# EAGLE board DRA818 (EAGLE 9.6.2)
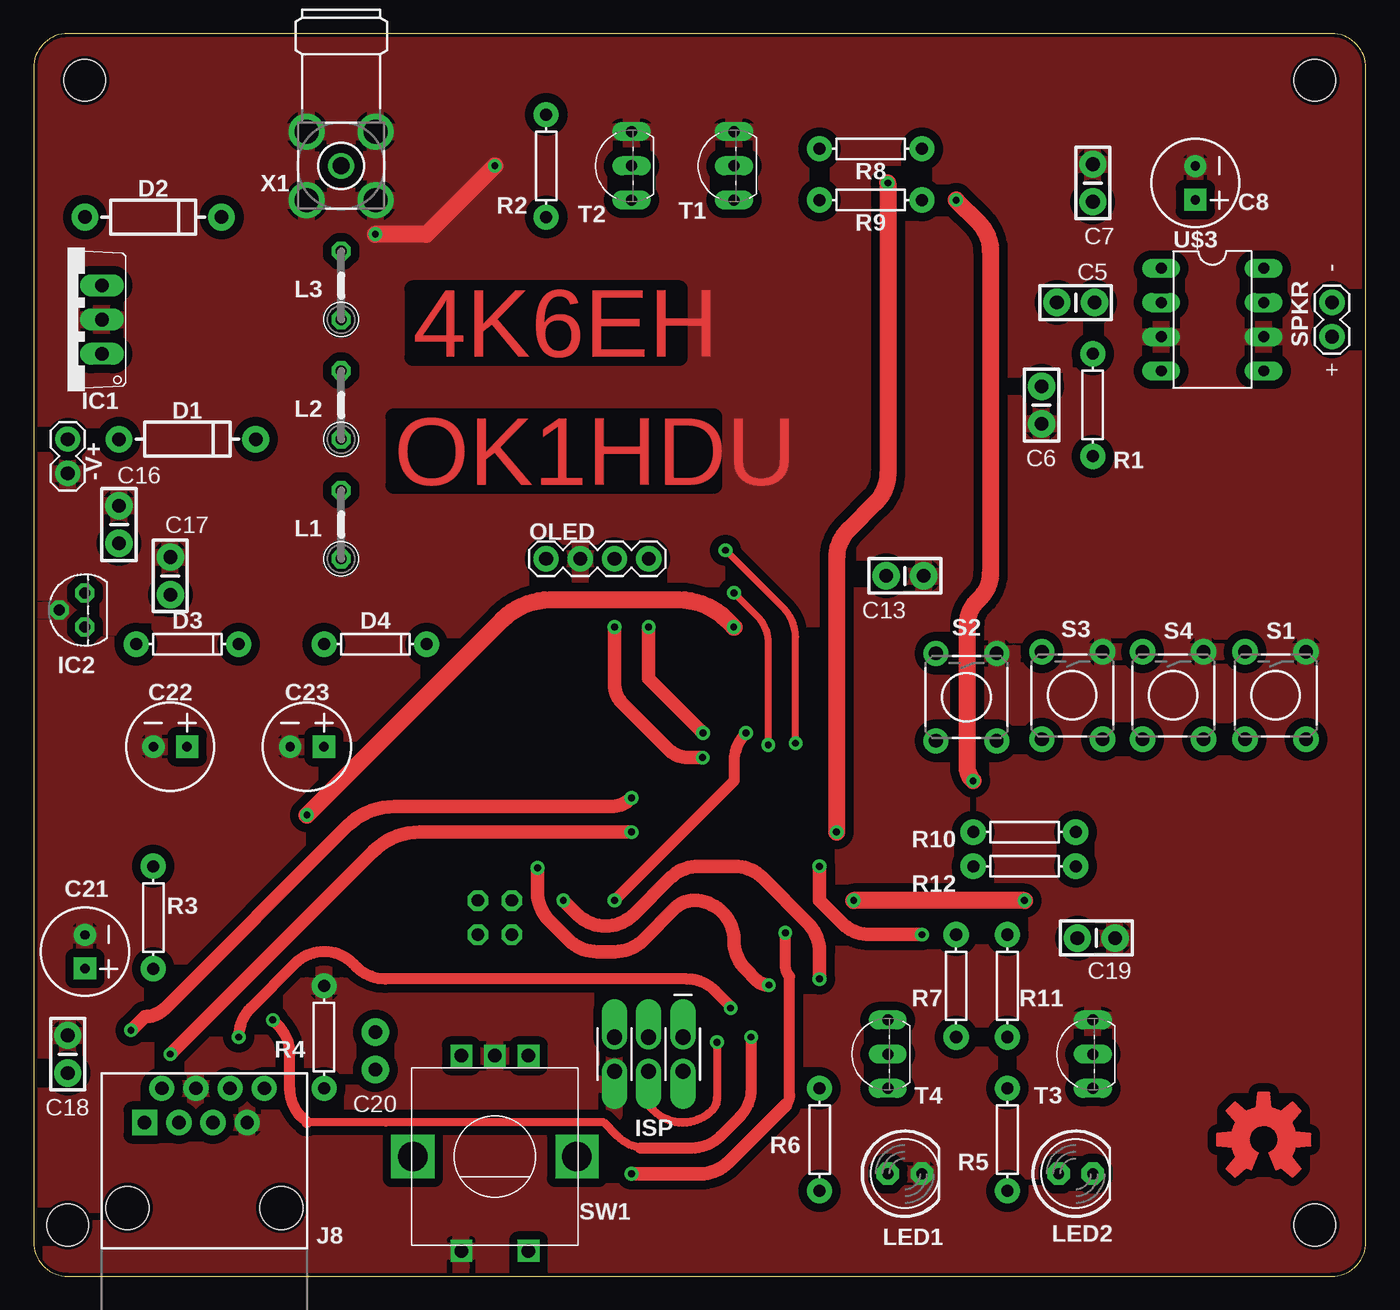
[diagram p0: board, top side]
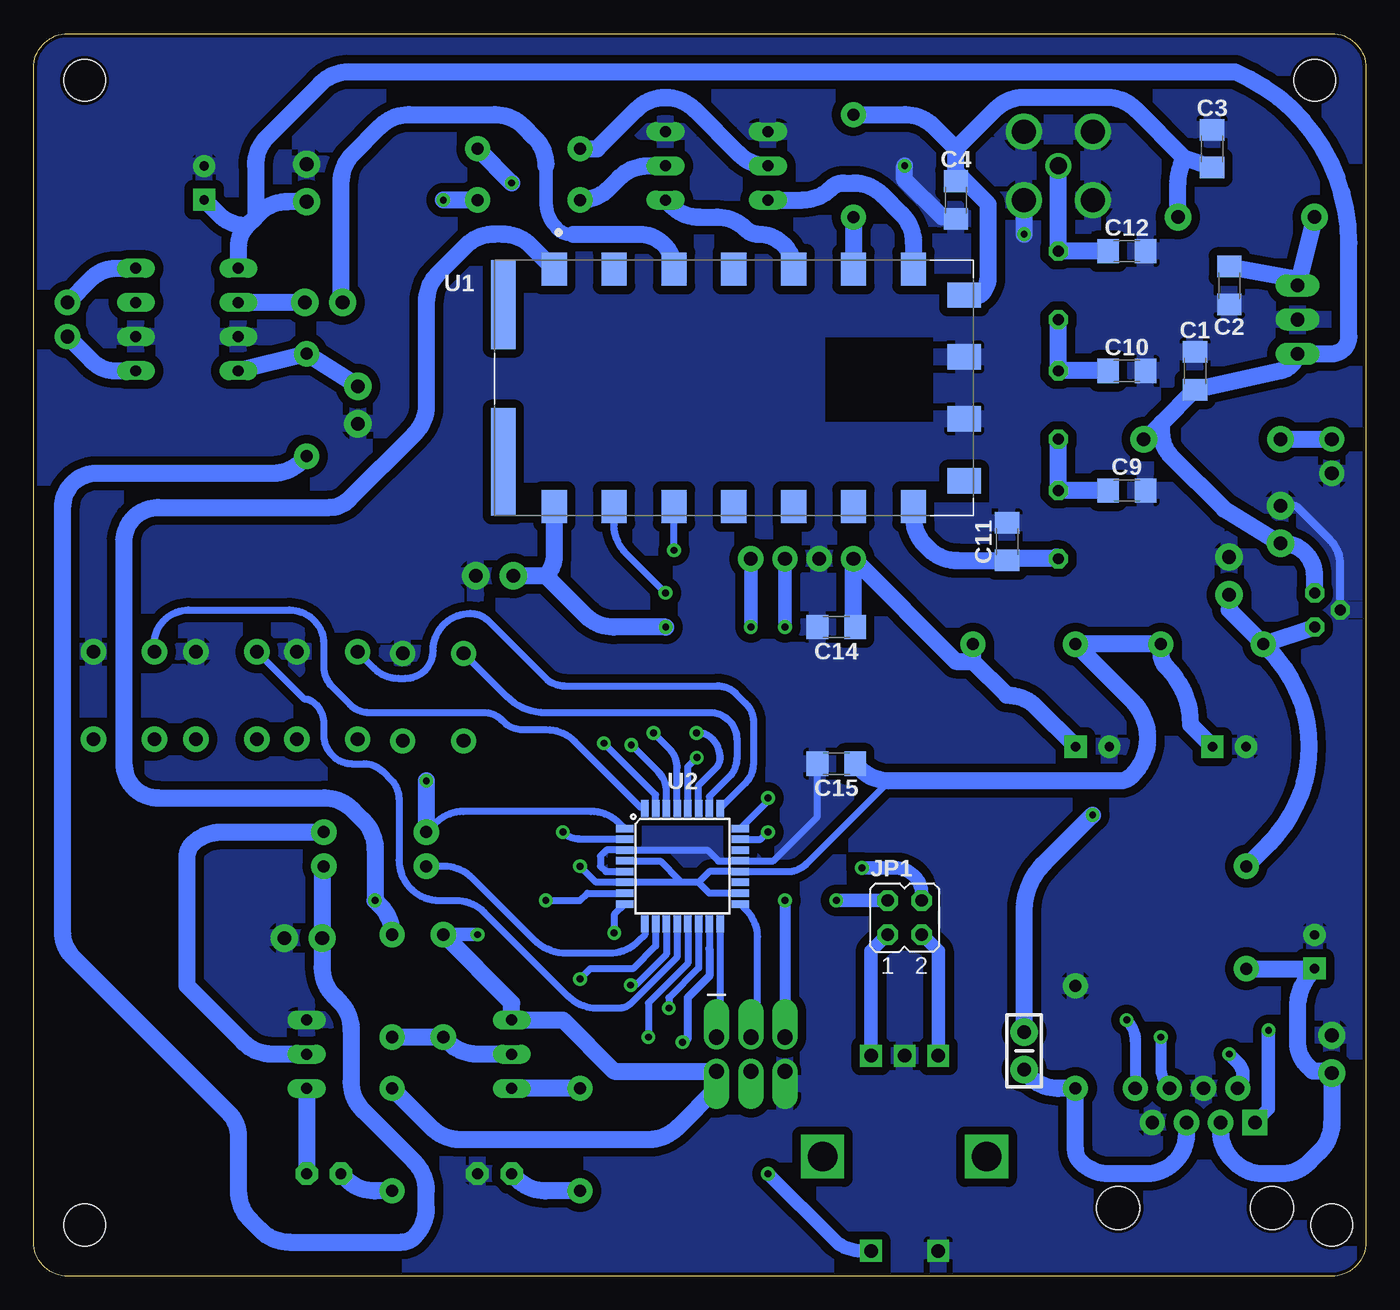
[diagram p1: board, bottom side, seen from below]

Size 99.04 x 92.38 mm. Coordinates in mm from the lower left corner, seen from the top.
Outline: 2.54,0 96.5,0 arc90 99.04,2.54 99.04,89.84 arc90 96.5,92.38 2.54,92.38 arc90 0,89.84 0,2.54 arc90 2.54,0
Copper layers (1*16): Top 0.035mm / dielectric 1.5mm / Bottom 0.035mm
Design rules "SparkFun *": minimum track width 8mil, minimum drill 20mil, track to track 25mil, track to pad 25mil, pad to pad 8mil, via to via 8mil, smd to smd 8mil, copper to edge 10mil, drill to drill 8mil, minimum pad ring 12mil, minimum via ring 10mil, stop-mask expansion 4mil, vias tented up to drill 25mil, thermal gap 10mil
Holes 3.1 mm at 95.25,88.9 95.25,3.81 3.81,88.9 2.54,3.81

## Footprints (pad centres in the part's own frame; a part is rotated, then mirrored left to right if it is on the bottom)
1X02 = drill 1.016 pad 1.88: 1 0,0; 2 2.54,0
1206 = smd 1.6 x 1.8: 1 -1.4,0; 2 1.4,0
CAP-PTH-SMALL-KIT = drill 1.016 pad 2.032: 1 -1.397,0; 2 1.397,0
CPOL-RADIAL-2.5MM-6.5MM = drill 0.7 pad 1.651 square: 1 1.25,0 | drill 0.7 pad 1.651: 2 -1.25,0
DIODE-1N4001 = drill 1 pad 1.981: A -5.08,0; C 5.08,0
DIODE-1N4148 = drill 0.9 pad 1.88: A -3.81,0; C 3.81,0
TO220V = drill 1.016 long: 1 -2.54,-2.54; 2 0,-2.54; 3 2.54,-2.54
TO92 = drill 0.813 octagon: 1 -1.27,0; 2 0,1.905; 3 1.27,0
2X3_OFFSET = drill 1.118 pad 1.88 offset: 1 -2.54,-1.27; 2 -2.54,1.27; 3 0,-1.27; 4 0,1.27; 5 2.54,-1.27; 6 2.54,1.27
RJ45-8 = drill 1 pad 1.88 square: 1 -4.445,6.35 | drill 1 pad 1.88: 2 -3.175,8.89; 3 -1.905,6.35; 4 -0.635,8.89; 5 0.635,6.35; 6 1.905,8.89; 7 3.175,6.35; 8 4.445,8.89 | hole 3.2: -5.715,0; 5.715,0
JP2Q = drill 0.914 octagon: 1 -1.27,-1.27; 2 -1.27,1.27; 3 1.27,-1.27; 4 1.27,1.27
0207/5V = drill 0.813 octagon: 1 -2.54,0; 2 2.54,0
LED5MM = drill 0.813 pad 1.676 octagon: A -1.27,0; K 1.27,0
1X04 = drill 1.016 pad 1.88: 1 0,0; 2 2.54,0; 3 5.08,0; 4 7.62,0
AXIAL-0.3 = drill 0.9 pad 1.88: P$1 -3.81,0; P$2 3.81,0
TACTILE_SWITCH_PTH_6.0MM = drill 1.016 pad 1.88: 1 -3.251,2.261; 2 3.251,2.261; 3 -3.251,-2.261; 4 3.251,-2.261
ALPS_EC12E_SW = drill 1 square: A -2.5,-7.5; B 2.5,-7.5; C 0,-7.5; D -2.5,7; E 2.5,7 | drill 2.2 square: GND1 -6.1,0; GND2 6.1,0
TO92-CBE = drill 0.813 long: B 0,0; C -2.54,0; E 2.54,0
TO92-EBC = drill 0.813 long: B 0,-1.27; C -2.54,-1.27; E 2.54,-1.27
DORJI_DRA818V = smd 1.88 x 2.47: 1 -13.35,8.825; 2 -8.9,8.825; 3 -4.45,8.825; 4 0,8.825; 5 4.45,8.825; 6 8.9,8.825; 7 13.35,8.825; 12 13.35,-8.825; 13 8.9,-8.825; 14 4.45,-8.825; 15 0,-8.825; 16 -4.45,-8.825; 17 -8.9,-8.825; 18 -13.35,-8.825 | smd 2.47 x 1.88: 8 17.125,6.9; 9 17.125,2.3; 10 17.125,-2.3; 11 17.125,-6.9 | smd 1.8 x 6.6: P2 -17.125,6.2 | smd 1.8 x 8: P3 -17.125,-5.5
TQFP32-08 = smd 1.27 x 0.559: 1 -4.293,2.8; 2 -4.293,2; 3 -4.293,1.2; 4 -4.293,0.4; 5 -4.293,-0.4; 6 -4.293,-1.2; 7 -4.293,-2; 8 -4.293,-2.8; 17 4.293,-2.8; 18 4.293,-2; 19 4.293,-1.2; 20 4.293,-0.4; 21 4.293,0.4; 22 4.293,1.2; 23 4.293,2; 24 4.293,2.8 | smd 0.559 x 1.27: 9 -2.8,-4.293; 10 -2,-4.293; 11 -1.2,-4.293; 12 -0.4,-4.293; 13 0.4,-4.293; 14 1.2,-4.293; 15 2,-4.293; 16 2.8,-4.293; 25 2.8,4.293; 26 2,4.293; 27 1.2,4.293; 28 0.4,4.293; 29 -0.4,4.293; 30 -1.2,4.293; 31 -2,4.293; 32 -2.8,4.293
DIL08 = drill 0.813 long: 1 -3.81,-3.81; 2 -1.27,-3.81; 3 1.27,-3.81; 4 3.81,-3.81; 5 3.81,3.81; 6 1.27,3.81; 7 -1.27,3.81; 8 -3.81,3.81
BU-SMA-H = drill 1.27: 1 0,0 | drill 1.778: 2 -2.55,2.55; 3 2.55,2.55; 4 2.55,-2.55; 5 -2.55,-2.55

## Placement (x,y rotation side)
-V+  [1X02]  2.54,59.69 90 top
C1  0.1uF  [1206]  12.7,67.31 90 bottom
C2  0.1uF  [1206]  10.16,73.66 270 bottom
C3  0.1uF  [1206]  11.43,83.82 90 bottom
C4  0.1uF  [1206]  30.48,80.01 270 bottom
C5  0.1uF  [CAP-PTH-SMALL-KIT]  77.47,72.39 0 top
C6  0.22uF  [CAP-PTH-SMALL-KIT]  74.93,64.77 270 top
C7  1uF  [CAP-PTH-SMALL-KIT]  78.74,81.28 90 top
C8  47uF  [CPOL-RADIAL-2.5MM-6.5MM]  86.36,81.28 270 top
C9  10pF  [1206]  17.78,58.42 0 bottom
C10  10pF  [1206]  17.78,67.31 0 bottom
C11  2.4pF  [1206]  26.67,54.61 90 bottom
C12  2.4pF  [1206]  17.78,76.2 0 bottom
C13  ***  [CAP-PTH-SMALL-KIT]  64.77,52.07 0 top
C14  0.1uF  [1206]  39.37,48.26 180 bottom
C15  0.1uF  [1206]  39.37,38.1 180 bottom
C16  0.1uF  [CAP-PTH-SMALL-KIT]  6.35,55.88 270 top
C17  0.1uF  [CAP-PTH-SMALL-KIT]  10.16,52.07 90 top
C18  0.1uF  [CAP-PTH-SMALL-KIT]  2.54,16.51 270 top
C19  0.22uF  [CAP-PTH-SMALL-KIT]  78.99,25.15 0 top
C20  0.22uF  [CAP-PTH-SMALL-KIT]  25.4,16.76 270 bottom
C21  47uF  [CPOL-RADIAL-2.5MM-6.5MM]  3.81,24.13 270 top
C22  220uF  [CPOL-RADIAL-2.5MM-6.5MM]  10.16,39.37 0 top
C23  220uF  [CPOL-RADIAL-2.5MM-6.5MM]  20.32,39.37 0 top
D1  [DIODE-1N4001]  11.43,62.23 0 top
D2  [DIODE-1N4001]  8.89,78.74 0 top
D3  1N4148  [DIODE-1N4148]  11.43,46.99 0 top
D4  1N4148  [DIODE-1N4148]  25.4,46.99 0 top
IC1  7805TV  [TO220V]  2.54,71.12 90 top
IC2  78L05Z  [TO92]  3.81,49.53 90 top
ISP  [2X3_OFFSET]  45.72,16.51 180 top
J8  RJ45  [RJ45-8]  12.7,5.08 0 top
JP1  [JP2Q]  34.29,26.67 0 bottom
L1  [0207/5V]  22.86,55.88 90 top
L2  [0207/5V]  22.86,64.77 90 top
L3  [0207/5V]  22.86,73.66 90 top
LED1  [LED5MM]  64.77,7.62 0 top
LED2  [LED5MM]  77.47,7.62 0 top
OLED  128x64px  [1X04]  38.1,53.34 0 top
R1  4k7  [AXIAL-0.3]  78.74,64.77 90 top
R2  10k  [AXIAL-0.3]  38.1,82.55 90 top
R3  47R  [AXIAL-0.3]  8.89,26.67 90 top
R4  680R  [AXIAL-0.3]  21.59,17.78 270 top
R5  1k  [AXIAL-0.3]  72.39,10.16 90 top
R6  1k  [AXIAL-0.3]  58.42,10.16 90 top
R7  2.7k  [AXIAL-0.3]  68.58,21.59 90 top
R8  2.7k  [AXIAL-0.3]  62.23,83.82 180 top
R9  2.7k  [AXIAL-0.3]  62.23,80.01 180 top
R10  2.7k  [AXIAL-0.3]  73.66,33.02 0 top
R11  4.7k  [AXIAL-0.3]  72.39,21.59 270 top
R12  5.6k  [AXIAL-0.3]  73.66,30.48 0 top
S1  [TACTILE_SWITCH_PTH_6.0MM]  92.33,43.18 270 top
S2  [TACTILE_SWITCH_PTH_6.0MM]  69.34,43.05 270 top
S3  [TACTILE_SWITCH_PTH_6.0MM]  77.22,43.18 270 top
S4  [TACTILE_SWITCH_PTH_6.0MM]  84.71,43.18 270 top
SPKR  8 Ohms  [1X02]  96.52,69.85 90 top
SW1  EC12E_SW  [ALPS_EC12E_SW]  34.29,8.89 180 top
T1  [TO92-CBE]  52.07,82.55 90 top
T2  [TO92-CBE]  44.45,82.55 90 top
T3  [TO92-CBE]  78.74,16.51 90 top
T4  BC327  [TO92-EBC]  62.23,16.51 90 top
U1  DRA818V  [DORJI_DRA818V]  46.99,66.04 0 bottom
U2  [TQFP32-08]  50.8,30.48 0 bottom
U$2  [OSHW-LOGO-L_COPPER]  91.44,10.16 0 top
U$3  TDA7052B  [DIL08]  87.63,71.12 270 top
X1  BU-SMA-H  [BU-SMA-H]  22.86,82.55 90 top

## Library data of the parts
-V+ ISP SPKR = SparkFun-Connectors
C1-C4 C9-C12 C14 C15 = SparkFun-Capacitors; PROD_ID: CAP-09822
C5-C7 C13 C16-C20 = SparkFun-Capacitors; PROD_ID: CAP-08370
C8 C21-C23 = SparkFun-Capacitors; PROD_ID: CAP-08439
D1 D2 = SparkFun-DiscreteSemi; PROD_ID: DIO-09176
D3 D4 = SparkFun-DiscreteSemi; PROD_ID: DIO-08378
IC1 IC2 = linear
J8 = SparkFun-Connectors; PROD_ID: CONN-08506; SF_ID: PRT-00643
JP1 = jumper
L1-L3 = rcl; SPICEPREFIX: L
LED1 LED2 = adafruit
OLED = SparkFun-Connectors; PROD_ID: CONN-09696
R1-R12 = SparkFun-Resistors
S1-S4 = SparkFun-Switches; PROD_ID: SWCH-08441; SF_SKU: COM-00097
SW1 = switch-alps; MPN: EC12E2424407; OC_FARNELL: 1520813; OC_NEWARK: 74M1068
T1-T3 = transistor
T4 = transistor-pnp
U1 = DRA818V; AVAILABILITY: Unavailable; MF: DORJI; MP: DRA818V; PACKAGE: Package; PRICE: None
U2 = SparkFun-IC-Microcontroller; PROD_ID: IC-09069
U$2 = SparkFun-Aesthetics
U$3 = tda7052b
X1 = con-coax; OC_FARNELL: unknown; OC_NEWARK: unknown

## Nets
4.3V: C3.1 C4.1 D2.C R2.P$2 U1.8
5V: C17.1 D3.A IC2.1 R3.P$2
12V: C1.1 C7.1 C8.1 C16.2 D1.C IC1.1 IC2.3 U$3.1
BT1: S1.3 U2.32
BT2: S2.3 U2.26
BT3: S3.3 U2.25
BT4: S4.3 U2.12
GND: -V+.1 C1.2 C2.2 C3.2 C4.2 C6.2 C7.2 C8.2 C9.2 C10.2 C11.2 C12.2 C13.2 C14.2 C15.2 C16.1 C17.2 C18.1 C19.2 C21.2 C22.2 C23.2 IC1.2 IC2.2 ISP.6 J8.4 J8.7 LED1.K OLED.2 R4.P$1 S1.1 S2.1 S3.1 S4.1 SW1.C SW1.E T1.E T2.E T3.E U1.9 U1.10 U2.3 U2.5 U2.21 U$3.3 U$3.6 X1.2 X1.3 X1.4 X1.5
L4.3V: C15.1 C22.1 D3.C D4.A ISP.2 R5.P$2 R7.P$2 T4.E U2.4 U2.6 U2.18 U2.20
MIC-DWN: J8.1 U2.24
MIC-FN: J8.8 U2.13
MIC-UP: J8.2 U2.23
MODULATION: C13.1 C20.1 U1.18
N$1: -V+.2 D1.A
N$2: R2.P$1 U1.6
N$3: C2.1 D2.A IC1.3
N$4: T1.C U1.5
N$5: T2.C U1.7
N$6: C11.1 L1.1 U1.12
N$7: C9.1 L1.2 L2.1
N$8: C10.1 L2.2 L3.1
N$9: C12.1 L3.2 X1.1
N$10: C5.1 U1.3
N$11: C5.2 U$3.2
N$12: SPKR.1 U$3.5
N$13: SPKR.2 U$3.8
N$15: ISP.4 U2.15
N$16: ISP.1 U2.16
N$17: ISP.3 U2.17
N$18: R9.P$1 R10.P$1 U2.1
N$19: R8.P$1 U2.2
N$20: R12.P$1 U2.9
N$21: JP1.3 SW1.B
N$22: JP1.1 SW1.A
N$23: R6.P$2 T4.C
N$24: LED1.A R6.P$1
N$25: LED2.A R5.P$1
N$26: LED2.K T3.C
N$27: C14.1 C23.1 D4.C OLED.1
N$28: C20.2 J8.5 R4.P$2
N$29: R7.P$1 R11.P$2 T4.B
N$30: C18.2 C21.1 J8.3 R3.P$1
N$31: C6.1 R1.P$2 U$3.4
PTT: R9.P$2 T1.B
PTT-IN: J8.6 U2.14
PTT_LED: R10.P$2 T3.B
PWR_H/L: R8.P$2 T2.B
RE-A: JP1.4 U2.11
RE-B: JP1.2 U2.10
RE-SW: SW1.D U2.8
RESET: ISP.5 U2.29
RXD: U1.16 U2.31
SCL: OLED.3 U2.28
SDA: OLED.4 U2.27
SQLCH: R11.P$1 U1.1 U2.7
TXD: U1.17 U2.30
VOL_CTRL: C19.1 R1.P$1 R12.P$2

## Tracks (layer width: path | path; a pad name or v marks a point on that pad's centre or on a via)
4.3V
  Bottom 1.27: 13.48,83.12 17.12,86.75 arc-45 19.24,87.63 25.43,87.63 arc-45 27.55,86.75 30.48,83.82 | U1.8 28.66,72.94 arc-45 28.07,74.37 28.07,79.69 30.48,82.11 | R2.P$2 34.26,86.36 arc45 32.14,85.48 30.48,83.82 | 13.48,83.12 arc-30 13.97,81.28 D2.C | C4.1 30.48,82.11 | 30.48,82.11 30.48,83.82 | C3.1 13.48,83.12
5V
  Bottom 1.27: C17.1 10.16,49.53 D3.A | D3.A 7.23,46.6 arc45 4.23,39.37 arc45 7.23,32.14 R3.P$2 | D3.A IC2.1
12V
  Bottom 1.27: C7.1 80.16,79.88 arc-45 82.29,79 82.55,78.74 | 82.55,78.74 83.19,78.1 | 83.19,78.1 arc-45 83.82,76.57 U$3.1 | C8.1 85.31,78.98 arc-45 83.19,78.1 | 82.55,78.74 82.55,82.58 arc45 81.67,84.7 77.71,88.66 arc45 75.59,89.53 9.74,89.53 arc67 1.27,76.84 1.27,69.85 arc90 2.54,68.58 IC1.1 arc65 6.35,67.31 C1.1 15.18,63.43 | IC2.3 3.81,52.07 arc-93 C16.2 10.54,57.02 14.43,60.91 arc45 15.18,62.71 15.18,63.43 | D1.C arc-45 16.29,62.32 15.18,63.43
BT1
  Bottom 0.508: S1.3 90.07,46.99 arc90 87.53,49.53 80.01,49.53 arc90 77.47,46.99 77.47,45.28 arc-45 76.88,43.86 75.52,42.5 arc-45 74.1,41.91 65.6,41.91 arc45 64.18,41.32 64.09,41.23 arc-45 62.67,40.64 60.93,40.64 arc45 58.81,39.76 53.98,34.93 arc-45 U2.32
BT2
  Bottom 0.508: S2.3 63.9,43.12 arc-45 60.97,41.91 48.77,41.91 arc90 46.77,39.91 46.77,38.52 arc45 47.35,37.1 48.8,35.66 U2.26
BT3
  Bottom 0.508: S3.3 73.72,45.19 arc-45 71.92,44.45 71.41,44.45 arc-90 69.34,46.51 arc90 66.58,49.28 arc45 65.22,48.72 60.99,44.48 arc-45 59.57,43.89 48.23,43.89 arc45 46.82,43.3 46.11,42.6 arc45 45.52,41.18 45.52,38.08 arc45 46.11,36.66 U2.25
BT4
  Bottom 0.508: U2.12 51.18,26.17 51.18,23.75 54.61,20.32 arc45 55.53,19.94 57.18,19.94 arc45 59.3,20.82 65.54,27.06 arc-45 67.66,27.94 68.88,27.94 arc90 71.88,30.94 71.88,35.49 arc-45 72.47,36.91 73.07,37.51 arc-45 74.49,38.1 75.37,38.1 arc45 76.79,38.69 76.88,38.78 arc45 77.47,40.2 77.47,41.08 arc-45 78.06,42.5 78.15,42.59 arc-45 78.94,42.92 S4.3
GND  (via drill 0.51)
  Top 1.27: v34.29,82.55 29.21,77.47 v25.4,77.47
  Bottom 0.508: C15.2 40.77,34.16 44.05,30.88 U2.21 46.53,30.86 48.13,30.86 48.95,31.68 U2.3 56.46,31.68 56.9,31.24 56.9,30.48 56.5,30.08 U2.5
  Bottom 0.61: IC2.2 1.91,52.92 arc-45 2.65,54.72 5.08,57.15 arc-45 5.39,57.28 C16.1
  Bottom 1.27: C4.2 30.61,78.74 31.5,78.74 34.29,81.53 v34.29,82.55 | v25.4,77.47 X1.5
  pour Bottom: -16.51,96.52 111.76,96.52 111.76,-5.08 -16.51,-5.08
  pour Top: -20.32,-7.62 -20.32,99.06 -17.78,99.06 115.57,99.06 115.57,97.79 115.57,-7.62
L4.3V  (via drill 0.51)
  Top 1.016: v58.42,30.48 58.42,27.94 60.08,26.28 arc45 62.2,25.4 v66.04,25.4
  Bottom 0.508: 35.43,36.83 41.59,30.67 arc45 43.01,30.08 U2.20 48.8,30.08 49.6,29.28 | U2.18 48.8,28.48 49.6,29.28 | 49.6,29.28 51.05,29.28 | 51.05,29.28 U2.6 57.22,29.28 v58.42,30.48 | U2.4 55.07,30.86 52.45,30.86 51.05,29.46 51.05,29.28
  Bottom 1.016: v66.04,25.4 R7.P$2
  Bottom 1.27: C22.1 13.05,41.01 arc-45 14.83,45.31 arc45 15.24,46.3 D3.C D4.A 17.39,42.79 arc45 16.24,40.01 arc45 17.39,37.22 arc45 18.33,36.83 35.43,36.83 arc45 37.6,37.73 C15.1 | R7.P$2 63.5,20.32 T4.E 59.69,19.05 55.88,15.24 ISP.2 48.26,13.97 51.19,11.04 arc45 53.31,10.16 67.34,10.16 arc45 69.46,11.04 R5.P$2
MIC-DWN  (via drill 0.51)
  Top 1.016: v44.45,35.56 arc-45 42.92,34.92 26.84,34.92 arc45 23.3,33.46 9.77,19.93 arc-45 8.25,19.3 v7.24,18.29
  Bottom 0.508: U2.24 44.45,35.34 v44.45,35.56
  Bottom 1.016: v7.24,18.29 7.24,12.45 J8.1
MIC-FN  (via drill 0.51)
  Top 0.61: 45.72,9.52 45.54,9.52 arc-45 43.42,10.4 42.39,11.44 26.19,11.44 26.19,11.43 20.32,11.43
  Top 0.813: v53.34,17.78 53.34,13.94 arc-45 52.46,11.82 51.04,10.4 arc-45 48.92,9.52 45.72,9.52 45.09,9.52 | 20.32,11.43 19.93,11.82 arc-45 19.05,13.94 19.05,16.54 arc45 18.17,18.66 v17.78,19.05
  Bottom 0.508: U2.13 50.4,23.26 53.34,20.32 v53.34,17.78
  Bottom 0.813: v17.78,19.05 arc45 17.14,17.52 J8.8
MIC-UP  (via drill 0.51)
  Top 1.016: v44.45,33.02 28.74,33.02 arc45 25.21,31.56 v10.16,16.51
  Bottom 0.508: U2.23 44.99,32.48 v44.45,33.02
  Bottom 1.016: v10.16,16.51 9.52,15.88 arc90 J8.2
MODULATION  (via drill 0.51)
  Top 1.27: v20.32,34.29 34.86,48.83 arc-45 38.39,50.29 47.97,50.29 arc-45 51.5,48.83 52.07,48.26 v52.04,48.26
  Bottom 1.27: U1.18 60.34,53.57 arc45 60.96,52.07 | 60.96,52.07 C13.1 | v52.04,48.26 55.91,48.26 arc45 58.03,49.14 60.96,52.07 | C20.1 25.4,27.14 arc45 23.94,30.67 v20.32,34.29
N$1
  Bottom 1.27: D1.A -V+.2
N$2
  Bottom 1.27: R2.P$1 U1.6
N$3
  Bottom 1.27: 10.03,74.93 C2.1 5.65,74.23 IC1.3 D2.A
N$4
  Bottom 1.27: T1.C 51.68,79.62 arc-45 49.56,78.74 48.23,78.74 arc45 46.11,77.86 arc-45 45.17,77.47 45.15,77.47 arc90 U1.5
N$5
  Bottom 1.27: T2.C 41.88,80.01 arc-45 39.76,80.89 arc45 38.82,81.28 38.07,81.28 arc45 35.95,80.4 34.52,78.97 arc45 33.64,76.85 U1.7
N$6
  Bottom 1.27: U1.12 33.64,56.47 arc-45 32.76,54.35 32.5,54.09 arc-45 30.38,53.21 C11.1 26.54,53.34 L1.1 22.99,53.47
N$7
  Bottom 1.27: L2.1 L1.2 C9.1
N$8
  Bottom 1.27: L3.1 L2.2 C10.1
N$9
  Bottom 1.27: X1.1 L3.2 C12.1
N$10
  Bottom 1.016: 60.96,82.58 60.96,79.98 arc-45 60.08,77.86 arc-45 59.14,77.47 58.93,77.47
  Bottom 1.27: 60.96,82.58 arc-45 61.84,84.7 62.62,85.48 arc-45 64.74,86.36 71.15,86.36 arc-45 73.27,85.48 75.32,83.43 arc-45 76.2,81.31 76.2,72.52 C5.1 | 58.93,77.47 54.04,77.47 arc90 U1.3
N$11
  Bottom 1.27: C5.2 U$3.2
N$12
  Bottom 1.27: SPKR.1 94.72,68.05 arc-45 92.93,67.31 U$3.5
N$13
  Bottom 1.27: SPKR.2 94.72,74.19 arc45 92.93,74.93 U$3.8
N$15  (via drill 0.51)
  Top 0.61: v50.8,17.4 50.8,13.25 arc-45 50.41,12.31 arc-45 48.29,11.43 48.23,11.43 arc-45 46.11,12.31 45.72,12.7 ISP.4
  Bottom 0.508: U2.15 48.8,24.35
  Bottom 0.61: 48.8,24.35 48.8,22.32 50.42,20.7 50.42,17.78 arc90 v50.8,17.4
N$16
  Bottom 0.508: U2.16 48,18.41 arc45 ISP.1
N$17
  Bottom 0.508: U2.17 46.12,27.29 arc45 45.24,25.17 45.24,18.95 arc45 ISP.3
N$18  (via drill 0.51)
  Top 1.27: v68.58,80.01 70.24,78.35 arc-45 71.12,76.23 71.12,52.23 arc-45 70.38,50.44 70.14,50.2 arc45 69.39,48.4 69.39,37.93 arc45 v69.85,36.83
  Bottom 0.508: U2.1 55.48,33.67 arc-45 57.6,34.55 67.08,34.55 arc-45 69.2,33.67 R10.P$1
  Bottom 1.27: R9.P$1 v68.58,80.01 | v69.85,36.83 R10.P$1
N$19  (via drill 0.51)
  Top 1.27: v63.5,81.28 63.5,59.66 arc-45 62.62,57.54 60.57,55.49 arc45 59.69,53.37 v59.69,33.02
  Bottom 0.508: v59.69,33.02 arc-45 58.46,32.51 55.13,32.51 U2.2
  Bottom 1.27: R8.P$1 v63.5,81.28
N$20
  Bottom 0.508: U2.9 53.6,25.39 54.11,24.88 arc45 56.23,24 59.41,24 arc45 61.84,25.01 66.43,29.6 arc-45 68.55,30.48 R12.P$1
N$21
  Bottom 1.016: JP1.3 31.79,24.17 SW1.B
N$22
  Bottom 1.016: JP1.1 36.79,24.17 SW1.A
N$23
  Bottom 1.27: R6.P$2 T4.C
N$24
  Bottom 1.27: R6.P$1 60.99,6.35 arc45 63.11,7.23 LED1.A
N$25
  Bottom 1.27: R5.P$1 73.69,6.35 arc45 75.81,7.23 LED2.A
N$26
  Bottom 1.27: T3.C LED2.K
N$27
  Bottom 1.27: C23.1 24.5,42.3 arc-45 26.62,43.18 arc45 26.7,43.21 29.21,45.72 | 29.21,45.72 D4.C | 29.21,45.72 30.48,45.72 OLED.1 38.1,48.39 C14.1
N$28
  Bottom 1.27: J8.5 13.34,10.62 arc90 16.34,7.62 19.08,7.62 arc45 21.2,8.5 arc45 21.59,9.44 R4.P$2 22.89,13.97 arc45 25.01,14.85 25.4,15.24 C20.2
N$29
  Bottom 1.27: R11.P$2 R7.P$1 68.19,17.39 arc-45 66.07,16.51 T4.B
N$30
  Bottom 1.27: J8.3 10.8,10.77 arc-45 9.92,8.65 9.77,8.5 arc-45 7.65,7.62 6.32,7.62 arc-45 4.2,8.5 3.42,9.28 arc-45 2.54,11.4 C18.2 | 3.83,22.86 C21.1 | C18.2 arc45 2.23,15.24 | R3.P$1 3.83,22.86 | C18.2 arc-45 2.85,15.24 3.81,15.24 arc45 4.03,15.33 4.34,15.64 arc45 5.08,17.43 5.08,19.84 arc45 3.83,22.86
N$31
  Bottom 1.27: U$3.4 R1.P$2 C6.1
PTT
  Bottom 1.27: R9.P$2 58.39,80.01 arc-45 56.27,80.89 55.49,81.67 arc45 53.37,82.55 T1.B
PTT-IN  (via drill 0.51)
  Top 0.813: v51.82,19.94 51.82,20.07 50.66,21.22 arc45 48.54,22.1 26.13,22.1 arc-45 24.01,22.98 23.74,23.25 arc45 21.62,24.13 arc45 19.4,23.21 16.12,19.93 arc45 15.24,17.81 v15.24,17.78
  Bottom 0.508: U2.14 49.6,22.92 51.82,20.7 v51.82,19.94
  Bottom 0.813: v15.24,17.78 15.24,15.5 arc-45 J8.6
PTT_LED
  Bottom 1.27: T3.B 81.31,16.51 arc45 83.43,17.39 87.63,21.59 87.63,31.2 arc45 87.24,32.14 arc45 85.12,33.02 R10.P$2
PWR_H/L
  Bottom 1.27: R8.P$2 57.15,83.82 54.22,86.75 arc45 52.1,87.63 52.04,87.63 arc45 49.92,86.75 46.6,83.43 arc-45 44.48,82.55 T2.B
RE-A  (via drill 0.51)
  Top 1.016: v54.66,21.64 v54.65,21.64 arc-45 53.72,22.03 52.95,22.8 arc-45 52.07,24.92 52.07,24.94 arc90 49.07,27.94 arc45 47.69,27.37 45.33,25.01 arc-45 43.21,24.13 41.88,24.13 arc-45 39.76,25.01 38.34,26.43 arc-45 37.47,28.55 v37.47,30.35
  Bottom 0.508: U2.11 52,23.95 54.31,21.64 v54.66,21.64
  Bottom 1.016: v37.47,30.35 34.99,30.35 arc45 33.58,29.77 arc45 33.02,28.42 JP1.4
RE-B  (via drill 0.51)
  Top 1.016: v58.42,22.1 58.42,24.16 arc45 57.54,26.28 54.22,29.6 arc45 52.1,30.48 49.45,30.48 arc45 47.33,29.6 44.64,26.91 arc-45 42.52,26.04 42.52,26.04 arc-45 40.4,26.91 v39.37,27.94
  Bottom 0.508: U2.10 52.8,24.54 54.48,22.86 57.66,22.86 v58.42,22.1
  Bottom 1.016: v39.37,27.94 JP1.2
RE-SW  (via drill 0.51)
  Top 0.813: v55.88,25.53 55.88,23.06 arc45 56.2,22.28 56.2,13.48 arc-45 55.88,12.7
  Top 1.016: v44.45,7.62 49.56,7.62 arc45 51.68,8.5 55.88,12.7
  Bottom 0.508: U2.8 55.88,26.89 v55.88,25.53
  Bottom 1.016: v44.45,7.62 39.6,2.77 arc-45 37.48,1.89 SW1.D
RESET  (via drill 0.51)
  Top 0.813: v52.96,40.39 52.95,40.38 arc45 52.07,38.25 52.07,36.83 v43.18,27.94
  Bottom 0.508: U2.29 51.2,37.8 arc-45 51.79,39.21 v52.96,40.39
  Bottom 0.813: v43.18,27.94 ISP.5
RXD  (via drill 0.51)
  Top 0.508: v56.64,39.62 56.64,47.52 arc45 55.76,49.65 v51.44,53.98
  Bottom 0.508: U2.31 52.8,35.78 v56.64,39.62 | v51.44,53.98 U1.16
SCL  (via drill 0.51)
  Top 1.016: v49.74,38.56 48.63,38.56 arc-45 47.21,39.15 43.77,42.59 arc-45 43.18,44.01 v43.18,48.26
  Bottom 0.508: U2.28 50.4,37.9 v49.74,38.56 49.78,38.61
  Bottom 1.016: v43.18,48.26 OLED.3
SDA  (via drill 0.51)
  Top 1.016: v49.77,40.39 45.72,44.43 v45.72,48.26
  Bottom 0.508: U2.27 49.6,36.51 48.32,37.79 arc-45 48.01,38.54 arc-45 48.59,39.96 arc-45 49.63,40.39 v49.77,40.39
  Bottom 1.016: v45.72,48.26 OLED.4
SQLCH  (via drill 0.51)
  Top 1.27: v73.66,27.94 v60.96,27.94
  Bottom 0.508: v60.96,27.94 58.42,27.94 57.88,28.48 U2.7
  Bottom 1.27: U1.1 62.07,76.59 arc-45 64.19,77.47 64.8,77.47 arc-45 66.92,76.59 68.97,74.54 arc-45 69.85,72.42 69.85,64.74 arc45 70.73,62.62 75.61,57.74 arc45 77.03,57.15 89.79,57.15 arc-90 92.33,54.61 92.33,38.1 arc-90 89.79,35.56 77.44,35.56 arc45 75.32,34.68 74.54,33.9 arc45 73.66,31.78 v73.66,27.94 73.27,27.55 arc45 72.39,25.43 R11.P$1
TXD  (via drill 0.51)
  Top 0.508: v52.07,50.8 53.73,49.14 arc-45 54.61,47.02 v54.61,39.5
  Bottom 0.508: U2.30 52,36.06 arc-45 52.59,37.47 v54.61,39.5 | v52.07,50.8 55.01,53.74 arc45 55.89,55.86 U1.17
VOL_CTRL
  Bottom 1.27: R1.P$1 79.13,60.57 arc45 81.25,59.69 94.36,59.69 arc-90 96.9,57.15 96.9,25.56 arc-45 96.16,23.77 84.56,12.17 arc45 83.82,10.38 83.82,6.32 arc-45 82.94,4.2 82.16,3.42 arc-45 80.04,2.54 71.67,2.54 arc-45 70.73,2.93 arc-45 69.85,5.05 69.85,6.38 arc-45 70.73,8.5 74.56,12.33 arc45 75.44,14.45 75.44,18.32 arc-45 76.32,20.44 76.72,20.84 arc45 77.6,22.96 C19.1 77.6,30.35 R12.P$2

## Text on the board
Top: 4K6EH | OK1HDU
tNames: C7 | - | C5 | + | C6 | C16 | C17 | C13 | C19 | C20 | C18
tStop: 4K6EH | OK1HDU